# Altium PCB 2019-08-14_06-15-04.PcbDoc
Units mil, origin at the board's own origin, x right, y up, seen from the top; angles counter-clockwise.
Board outline 1600 x 2200 mil, 4 copper layers (Top Layer, MidLayer1, MidLayer2, Bottom Layer); 15 components, 9 nets, 33 pads, 76 vias.
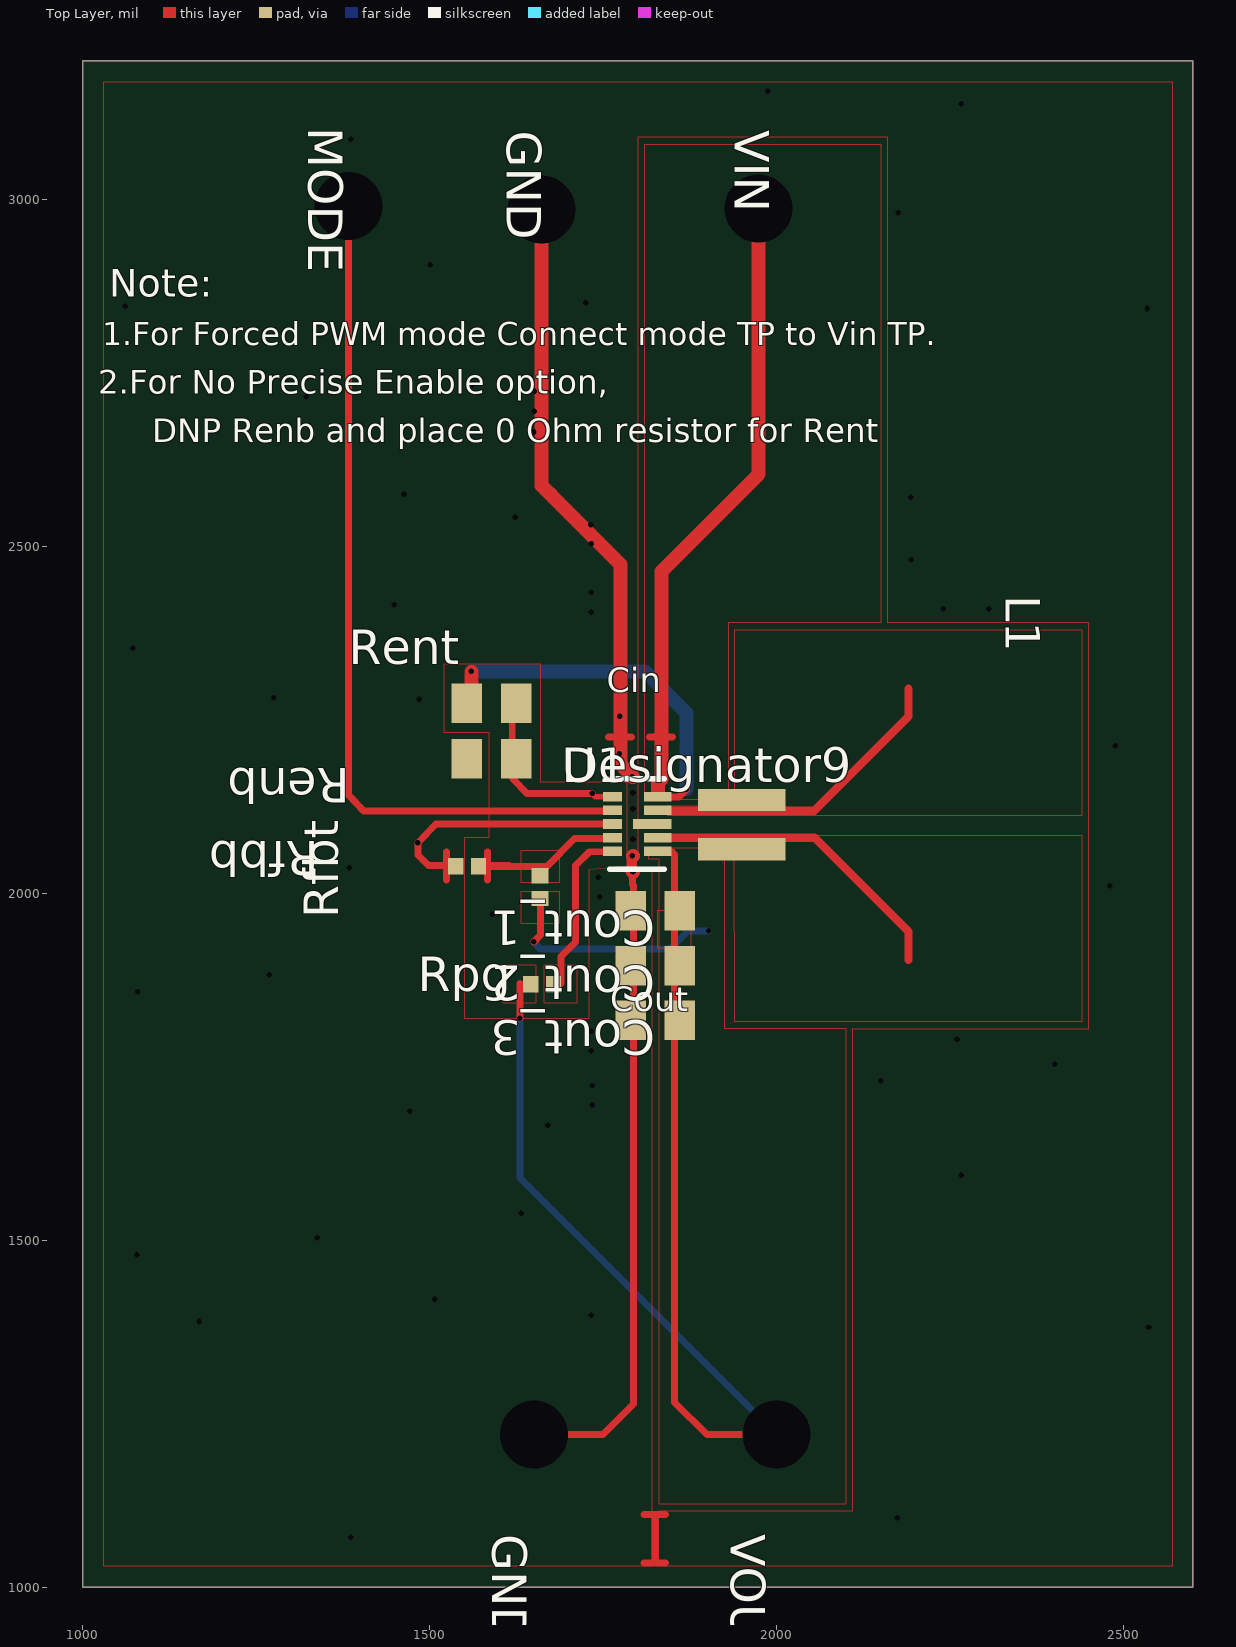
[diagram p0: Top Layer view]
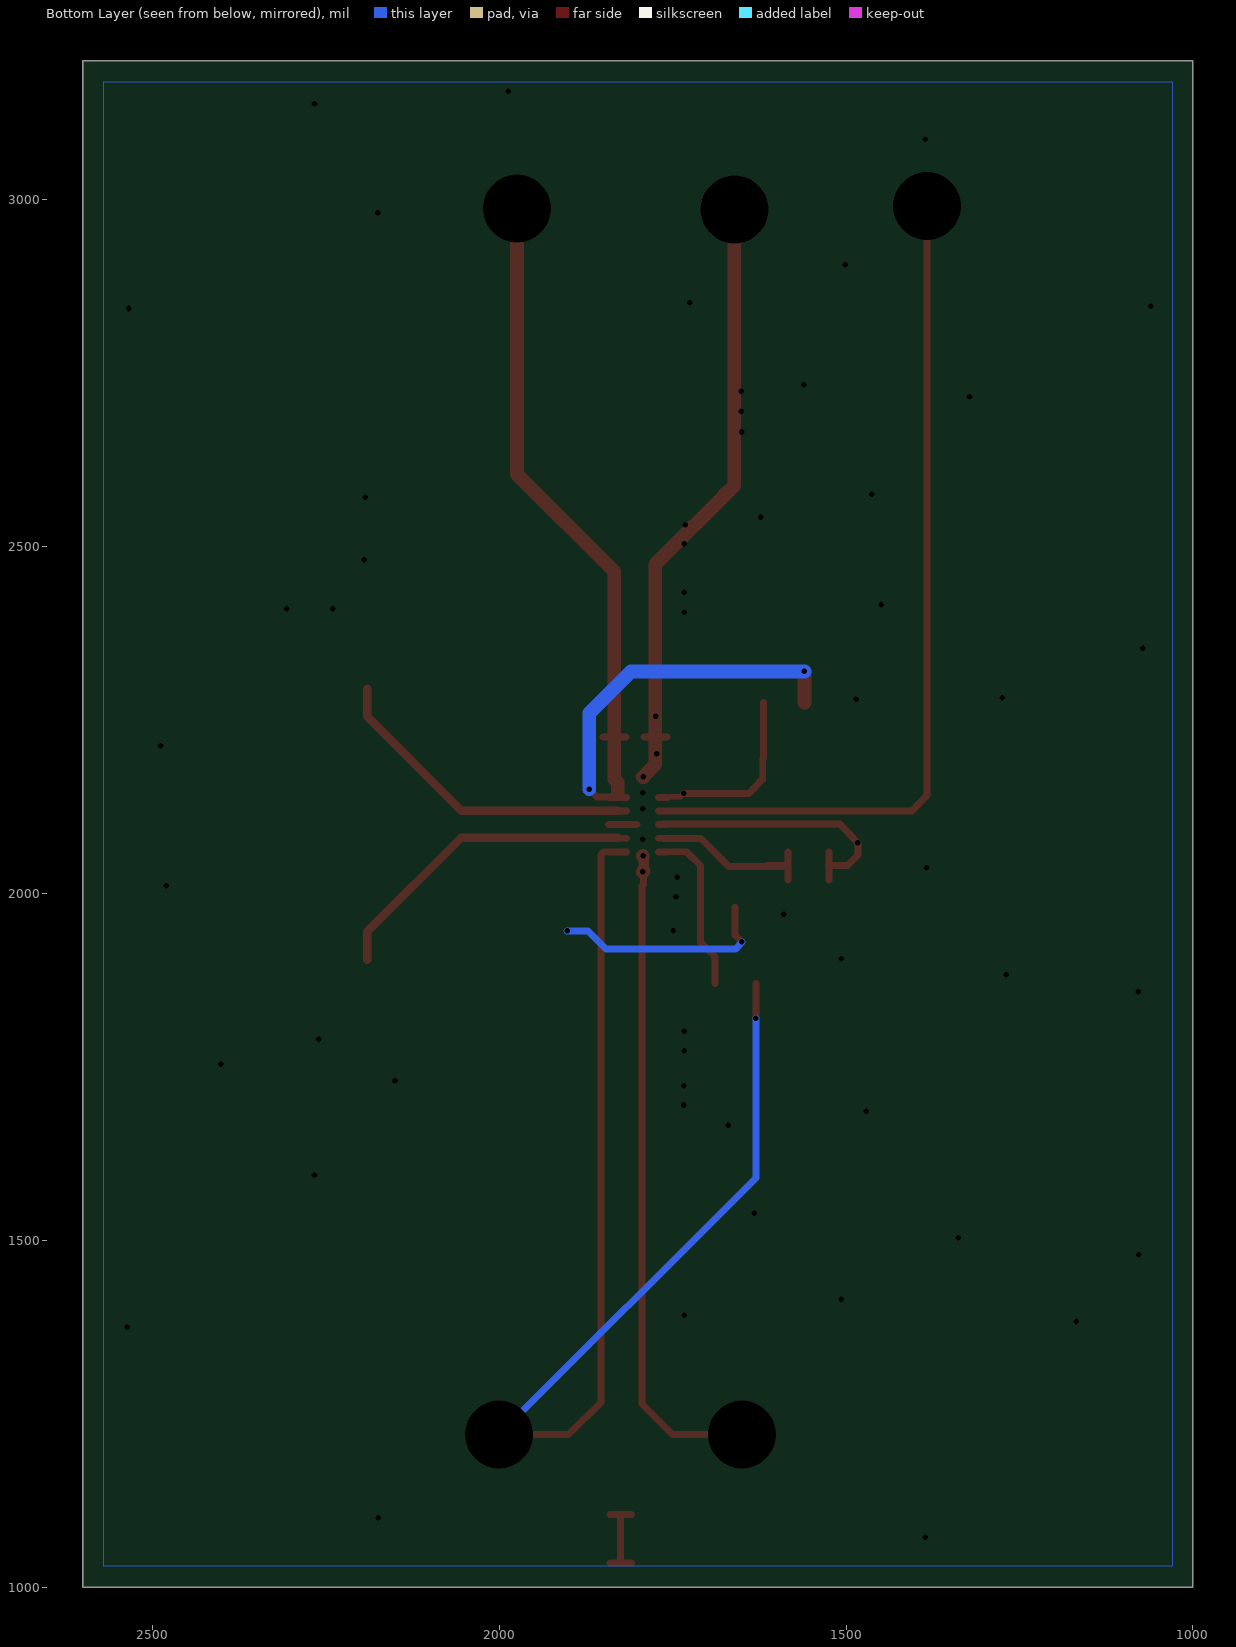
[diagram p1: Bottom Layer view, seen from below]

## Layer stack, top to bottom
Top Layer: signal copper 1.4
Dielectric: core 12.6, FR-4, Dk 4.8
MidLayer1: signal copper 1.4
Dielectric: prepreg 12.6, FR-4, Dk 4.8
MidLayer2: signal copper 1.4
Dielectric: core 12.6, FR-4, Dk 4.8
Bottom Layer: signal copper 1.4

## Board outline
1000,1000 2600,1000 2600,3200 1000,3200

## Design rules (kind name [scope] priority, off if disabled: settings)
PlaneConnect [All] p0: scope1count=1 scope1_0_kind=Board scope1_0_value=Board scope2count=1 scope2_0_kind=Board scope2_0_value=Board commentlength=0 planeconnectstyle=Direct reliefexpansion=20 reliefentries=4 reliefconductorwidth=10 reliefairgap=10
PlaneConnect [All] p1: planeconnectstyle=Direct reliefexpansion=20 reliefentries=4 reliefconductorwidth=10 reliefairgap=10
PolygonConnect [All] p0: scope1count=1 scope1_0_kind=Board scope1_0_value=Board scope2count=1 scope2_0_kind=Board scope2_0_value=Board commentlength=0 connectstyle=Direct reliefconductorwidth=10 reliefentries=4 polygonreliefangle="90 Angle"
PolygonConnect [All] p1: connectstyle=Direct reliefconductorwidth=10 reliefentries=4 polygonreliefangle="90 Angle"

## Components (designator, comment, footprint, x,y, rotation, side; value= is the part's Value field where it differs from the comment)
Cout_1 "" 0805 1825,1975 r180 top
Cout_2 "" 0805 1825,1896 r180 top
Cout_3 "" 0805 1825,1817 r180 top
GND "" TP-1502 1661,2985 r270 top
GND1 "" TP-1502 1649,1220 r270 top
L1 "" FP-XEL3520-471ME 1950,2099 r270 top
MODE "" TP-1502 1382,2990 r270 top
Renb "" 0805 1589,2194 r180 top
Rent "" 0805 1589,2274 r0 top
Rfbb "" 0402 1554,2039 r180 top
Rfbt "" 0402 1659,2009 r90 top
Rpg "" 0402 1662,1869 r0 top
U1 "" DLA0010A 1799,2100 r0 top
VIN "" TP-1502 1974,2986 r270 top
VOUT "" TP-1502 2000,1220 r270 top

## Footprints (in the part's own frame and the unit in brackets; to place one, negate y for a bottom-side part, rotate by r counter-clockwise, add the part's x,y. Pads: shape width x height; smd on the part's side, far side on the other; paste and mask are expansions set on the pad)
0402 [mil]
  rect 22x24 smd: 1(-16.5,0) 2(16.5,0)
0805 [mil]
  rect 44x57 smd: 1(-35.5,0) 2(35.5,0)
DLA0010A [mm]
  rect 0.7x0.35 smd: 1(-0.9,1) 2(-0.9,0.5) 3(-0.9,0) 4(-0.9,-0.5) 5(-0.9,-1)
  rect 1x0.35 smd: 6(0.75,-1) 7(0.75,-0.5) 9(0.75,0.5) 10(0.75,1)
  rect 1.4x0.35 smd: 8(0.55,0)
  silkscreen extent -1,-1.65 1,1.65
FP-XEL3520-471ME [mm]
  rect 0.81x3.2 smd: 1(-0.9,0) 2(0.9,0)
TP-1502 [mil]
  round 65 / inner round 0 / far side round 65 hole 32: 1(0,0)

## Via types
v1: diameter 0, hole 8, Top Layer to Bottom Layer, 71 vias
v2: diameter 0, hole 98, Top Layer to Bottom Layer, 5 vias

## Nets (pads, with @x,y where several pads share a name; then routed paths per layer and width w, separated by ;. In a path a pad name is that pad's centre, name@x,y a point inside that pad or via, vN(x,y) a via of type N, cw(c..) or ccw(c..) an arc to the next point about the centre after c; other vN are vias at no path point)
0: Cout_1.2 Cout_2.2 Cout_3.2 GND1.1 GND.1 Renb.2 Rfbb.2 U1.3 U1.8 | length 2484.2
  Top Layer w10: 1524.5,2019 1524.5,2060 ; 1525,2040 1498,2040 1483,2055 v1(1483,2073) 1509,2100 U1.3@1764,2100 ; v2(1650,1220) 1750,1220 1794,1264 1794,1949 1794,2011 1792,2013 1792,2032 ; U1.3@1757,2099.5 U1.3@1770,2099.5 ; 1758,2225.5 1791,2225.5 ; 1789,2036 1789,2054 ; 1789,2044 1794,2044 ; 1794,2036 1794,2054 ; U1.8@1801,2099.5 U1.8@1842,2099.5 ; 1809,1035 1825,1035 ; 1809,1105 1825,1105 ; 1840,1035 1825,1035 ; 1840,1105 1825,1105 ; 1825,1035 1825,1105
  Top Layer w20: v2(1661,2986) 1661,2588 ; 1675,2575 1661,2588 ; 1792,2032 v1(1793,2031) ; 1793,2168 v1(1792,2168) 1775,2186 1775,2226 1775,2474 1661,2588
  other v1: 1386,1072 2174,1100 2536,1375 1168,1383 1733,1392 1507,1415 1078,1479 1338,1504 1632,1539 2266,1594 1670,1666 1471,1686 1734,1695 1734,1723 2150,1730 2401,1754 1733,1773 2260,1790 1733,1801 1079,1858 1269,1883 1507,1906 1749,1946 1590,1970 1745,1995 2480,2011 1743,2023 1384,2037 1792,2054 1793,2078 1793,2122 1793,2145 1773,2201 2488,2213 1774,2255 1485,2280 1275,2282 1072,2353 1733,2405 2240,2410 2306,2410 1449,2416 1733,2434 2194,2481 1733,2504 1732,2531 1623,2542 2193,2571 1463,2575 1650,2665 1651,2695 1322,2716 1651,2724 1561,2733 2534,2843 1061,2846 1725,2851 1501,2906 2175,2981 1386,3087 2266,3138 1987,3156
2: Renb.1 Rent.2 U1.1 | length 278.5
  Top Layer w8: v1(1734,2144) 1739,2139 U1.1@1764,2139
  Top Layer w10: Rent.2@1619,2275 1619,2195 1620,2194 1620,2165 1640,2144 v1(1734,2144) ; U1.1@1757,2138.5 U1.1@1770,2138.5
5: Rfbb.1 Rfbt.2 U1.4 | length 282
  Top Layer w10: 1583.5,2019 1583.5,2060 ; U1.4@1757,2079.5 U1.4@1770,2079.5 ; U1.4@1764,2079 1709,2079 1669,2039 1660,2039 1614,2039 ; 1614,2039 1614,2040 1584,2040 1585,2039 1614,2039
8: Cout_1.1 Cout_2.1 Cout_3.1 Rfbt.1 Rpg.1 U1.6 VOUT.1 | length 2131
  Top Layer w10: v1(1630,1820) 1630,1870 ; v1(1650,1930) 1660,1940 1660,1980 ; U1.6@1816,2059.5 U1.6@1841,2059.5 ; U1.6@1829,2060 1849,2060 1853,2056 1853,1949 1853,1266 1900,1220 v2(2000,1220)
  Bottom Layer w10: v1(1630,1820) 1630,1590 v2(2000,1220) ; v1(1650,1930) 1659,1920 1846,1920 1872,1946 v1(1902,1946)
10: L1.2 U1.7 | length 482.9
  Top Layer w10: U1.7@1816,2079.5 U1.7@1841,2079.5
  Top Layer w12: U1.7@1829,2080 2055,2080 2190,1945 2190,1904
11: Rpg.2 U1.5 | length 254
  Top Layer w10: Rpg.2@1689,1870 1689,1909 1710,1930 1710,2040 1730,2060 U1.5@1764,2060 ; U1.5@1757,2059.5 U1.5@1770,2059.5
12: MODE.1 U1.2 | length 1252.8
  Top Layer w10: v2(1383,2991) 1383,2257 1383,2142 1405,2119 1520,2119 U1.2@1764,2119 ; U1.2@1757,2118.5 U1.2@1770,2118.5
14: L1.1 U1.9 | length 482.3
  Top Layer w10: U1.9@1816,2118.5 U1.9@1841,2118.5
  Top Layer w12: U1.9@1829,2119 2054,2119 2190,2255 2190,2295
15: Rent.1 U1.10 VIN.1 | length 1497.5
  Top Layer w10: 1560,2319 v1(1560,2320) ; U1.10@1816,2138.5 U1.10@1841,2138.5 ; 1817,2225.5 1850,2225.5 ; U1.10@1829,2139 1859,2139 v1(1870,2150)
  Top Layer w20: Rent.1@1560,2275 1560,2319 ; U1.10@1829,2143 1829,2160 1834,2165 1834,2226 1834,2464 1974,2604 v2(1974,2987)
  Bottom Layer w20: v1(1560,2320) 1810,2320 1870,2260 v1(1870,2150)

## Polygon pours and split planes (outlines as drawn)
8 on Top Layer " " (solid, pour order 0): 1632,1956 1632,2003 1687,2003 1687,1956
5 on Top Layer " " (solid, pour order 1): 1632,2015 1632,2062 1687,2062 1687,2015
8 on Top Layer " " (solid, pour order 2): 1829,1921 1829,1976 1876,1976 1876,1921
11 on Top Layer " " (solid, pour order 3): 1665,1842 1665,1897 1712,1897 1712,1842
8 on Top Layer " " (solid, pour order 4): 1606,1842 1606,1897 1653,1897 1653,1842
14 on Top Layer " " (solid, pour order 5): 1865,2126 1940,2126 1940,2380 2440,2380 2440,2112 1843,2112 1843,2126
10 on Top Layer " " (solid, pour order 6): 2440,1815 1940,1815 1939,2075 1812,2084 1887,2084 2440,2084
8 on Top Layer " " (solid, pour order 7): 2100,1805 1925,1805 1925,2065 1815,2065 1815,2050 1830,2050 1830,1120 1908,1120 2100,1120
15 on Top Layer " " (solid, pour order 8): 1810,2135 1810,3080 2150,3080 2150,2390 1930,2390 1930,2181 1930,2135
0 on Top Layer " " (solid, pour order 12): 1785,2040 1800,2035 1820,2035 1820,1030 1030,1030 1030,3170 2570,3170 2570,1030 1830,1030 1830,1110 2110,1110 2110,1805 2450,1805 2450,2390 2160,2390 2160,3090 1800,3090 1800,2105 1845,2095 1800,2095 1800,2050 1785,2050 1785,2160 1660,2160 1660,2330 1520,2330 1520,2232 1585,2232 1585,2080 1550,2080 1550,1820 1730,1820 1730,2035
0 on Bottom Layer " " (solid, pour order 11): 2570,3170 1030,3170 1030,1030 2570,1030
0 on MidLayer2 " " (solid, pour order 9): 2570,3170 2570,1030 1030,1036 1030,3170
0 on MidLayer1 " " (solid, pour order 10): 1030,1036 1030,3170 2570,3170 2570,1030

## Other copper
Multi-Layer:
  the board outline again, w1

## Silkscreen, mask and mechanical layers (free items; w line width, h text height)
Top Overlay:
  text "Note:" at 1038,2860 h40
  text "1.For Forced PWM mode Connect mode TP to Vin TP." at 1028,2790 h33
  text "2.For No Precise Enable option," at 1022,2720 h34
  text "DNP Renb and place 0 Ohm resistor for Rent" at 1100,2650 h34
  text "Cin" at 1755,2290 h35
  text "Cout" at 1760,1830 h35

## Text inside footprints (layer, text, board x,y; h text height)
U1: Top Overlay "Designator9" at 1690,2160 h50